# Altium PCB UF_Servo.PcbDoc (part 2 of 12)
Units mm, origin at the board's own origin, x right, y up, seen from the top; angles counter-clockwise.
Board outline 222.63 x 100.1 mm, 6 copper layers (L1, L2, L3, L4, L5, L6), stack 1.609 mm thick; 1138 components, 775 nets, 3720 pads, 1641 vias.
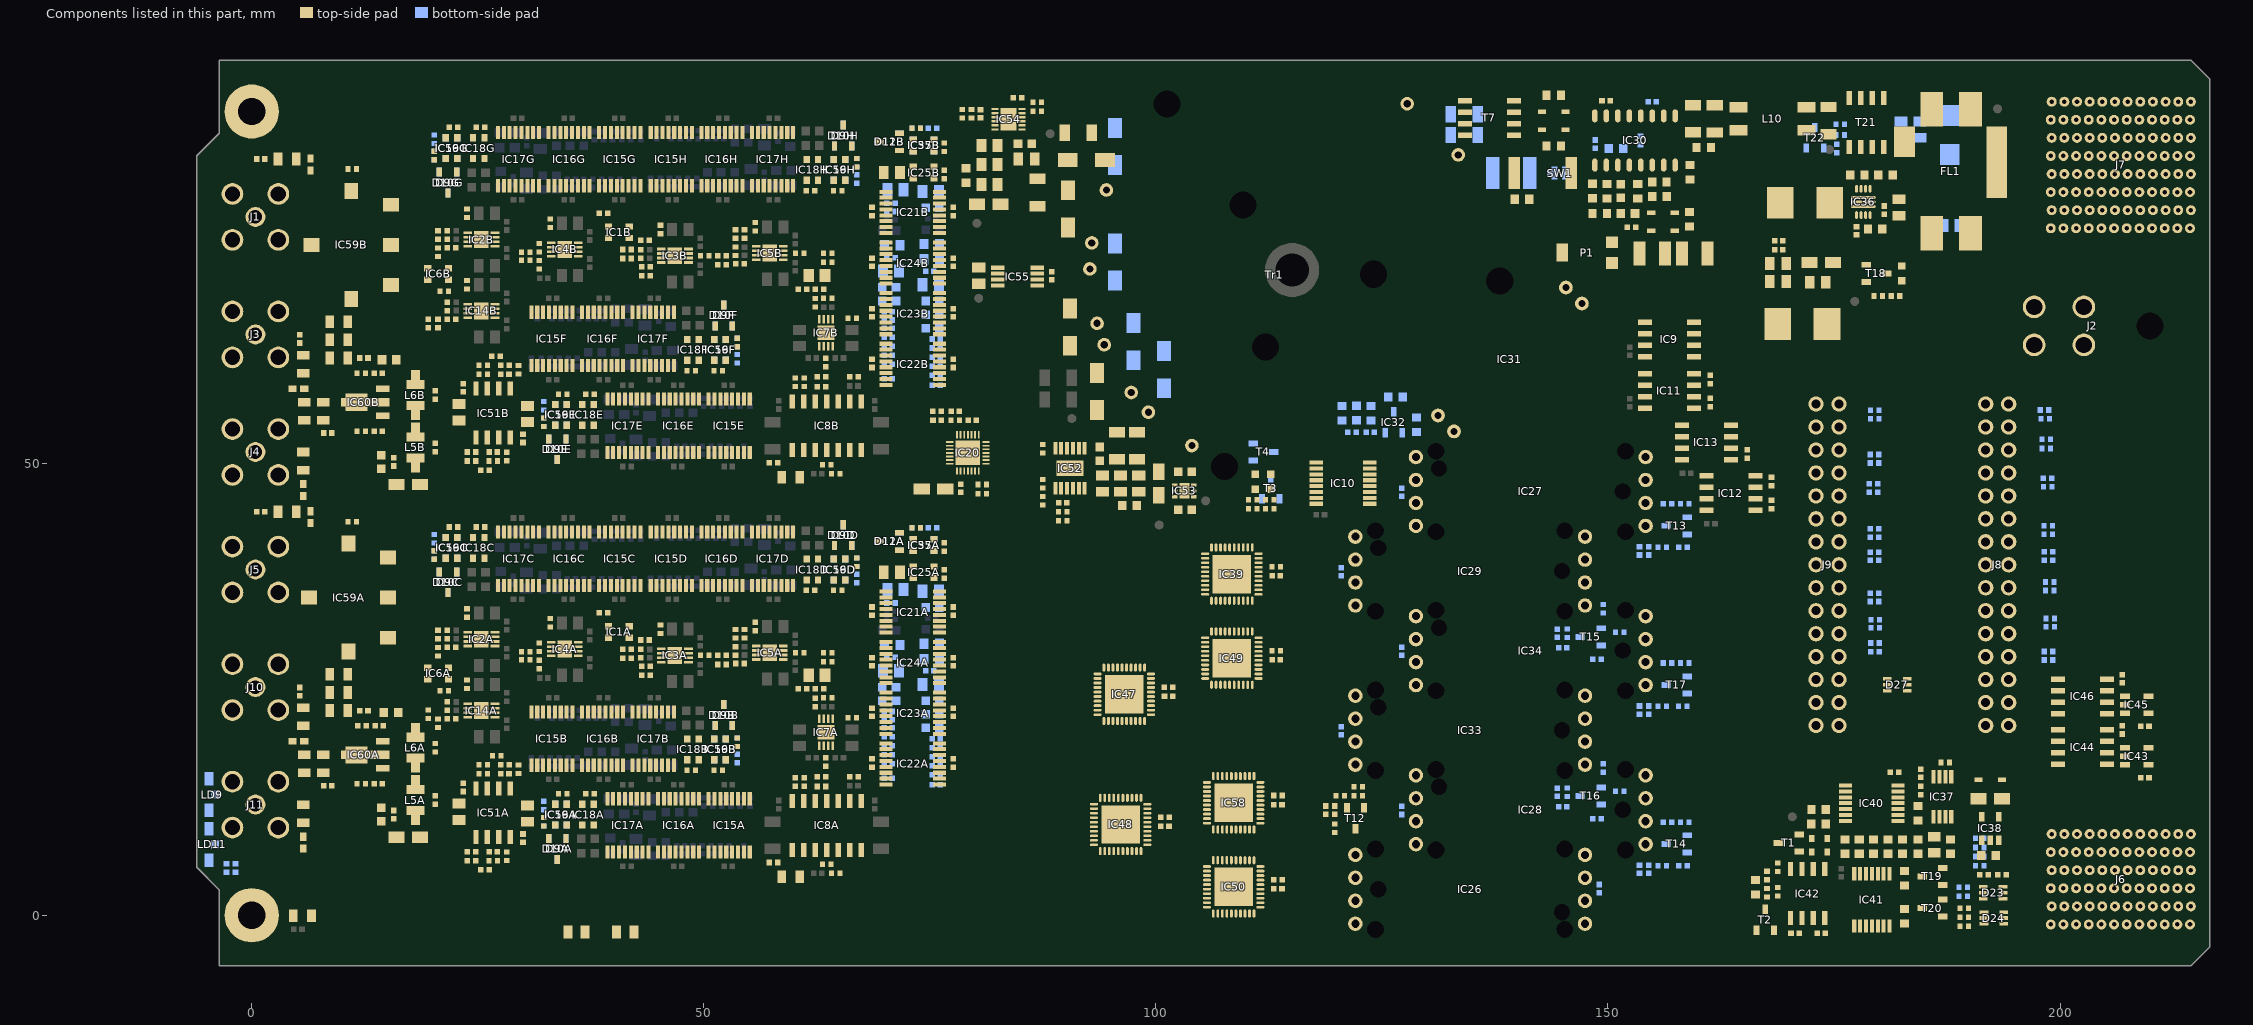
[diagram p6: the components of this part, seen from the top]

## Components (designator, comment, footprint, x,y, rotation, side; value= is the part's Value field where it differs from the comment) (continued)
C84B "22nF" CAPC1005X55N 70.7,77.9 r0 bottom (schematic designator C84)
C85A "1.5uF" CAPC2012X95N 71.2,36.1 r180 bottom (schematic designator C85)
C85B "1.5uF" CAPC2012X95N 71.2,80.3 r180 bottom (schematic designator C85)
C86A "100nF" CAPC1005X55N 70.7,34.6 r180 bottom (schematic designator C86)
C86B "100nF" CAPC1005X55N 70.7,78.8 r180 bottom (schematic designator C86)
C87A "2.2uF" CAPC2012X95N 75.1,35.9 r0 bottom (schematic designator C87)
C87B "2.2uF" CAPC2012X95N 75.1,80.1 r0 bottom (schematic designator C87)
C88A "1uF" CAPC1608X90N 75.3,34.1 r0 bottom (schematic designator C88)
C88B "1uF" CAPC1608X90N 75.3,78.3 r0 bottom (schematic designator C88)
C89A "100nF" CAPC1005X55N 68.6,33.7 r270 top (schematic designator C89)
C89B "100nF" CAPC1005X55N 68.6,77.9 r270 top (schematic designator C89)
C90A "470nF" CAPC1005X55N 26.7,7.1 r0 top (schematic designator C90)
C90B "470nF" CAPC1005X55N 26.7,51.3 r0 top (schematic designator C90)
C91A "470nF" CAPC1005X55N 28,15.7 r0 top (schematic designator C91)
C91B "470nF" CAPC1005X55N 28,59.9 r0 top (schematic designator C91)
C92 "47uF" CAPC3216X180N 86.9,80 r270 top
C93 "47uF" CAPC3216X180N 91.4,86.6 r0 top
C94A "10uF" CAPC2012X95N 22.9,11.5 r90 top (schematic designator C94)
C94B "10uF" CAPC2012X95N 22.9,55.7 r90 top (schematic designator C94)
C95A "100nF" CAPC1005X55N 23.4,14.2 r270 top (schematic designator C95)
C95B "100nF" CAPC1005X55N 23.4,58.4 r270 top (schematic designator C95)
C96A "100nF" CAPC1005X55N 77.6,33.7 r270 top (schematic designator C96)
C96B "100nF" CAPC1005X55N 77.6,77.9 r270 top (schematic designator C96)
C97A "100pF" CAPC1005X55N 75.7,14.5 r180 bottom (schematic designator C97)
C97B "100pF" CAPC1005X55N 75.7,58.7 r180 bottom (schematic designator C97)
C98A "200pF" CAPC1005X55N 70.4,15.2 r180 bottom (schematic designator C98)
C98B "200pF" CAPC1005X55N 70.4,59.4 r180 bottom (schematic designator C98)
C99A "200pF" CAPC1005X55N 70.4,16.8 r180 bottom (schematic designator C99)
C99B "200pF" CAPC1005X55N 70.4,61 r180 bottom (schematic designator C99)
C100A "200pF" CAPC1005X55N 70.4,17.8 r180 bottom (schematic designator C100)
C100B "200pF" CAPC1005X55N 70.4,62 r180 bottom (schematic designator C100)
C101A "750pF" CAPC1005X55N 75.7,15.6 r0 bottom (schematic designator C101)
C101B "750pF" CAPC1005X55N 75.7,59.8 r0 bottom (schematic designator C101)
C102A "47pF" CAPC1005X55N 75.7,16.6 r180 bottom (schematic designator C102)
C102B "47pF" CAPC1005X55N 75.7,60.8 r180 bottom (schematic designator C102)
C103A "100nF" CAPC1005X55N 68.6,16.9 r270 top (schematic designator C103)
C103B "100nF" CAPC1005X55N 68.6,61.1 r270 top (schematic designator C103)
C104A "100nF" CAPC1005X55N 77.6,16.9 r270 top (schematic designator C104)
C104B "100nF" CAPC1005X55N 77.6,61.1 r270 top (schematic designator C104)
C105A "1.5nF" CAPC1005X55N 75.7,17.6 r0 bottom (schematic designator C105)
C105B "1.5nF" CAPC1005X55N 75.7,61.8 r0 bottom (schematic designator C105)
C106A "100pF" CAPC1005X55N 75.7,18.6 r180 bottom (schematic designator C106)
C106B "100pF" CAPC1005X55N 75.7,62.8 r180 bottom (schematic designator C106)
C107A "1.5nF" CAPC1005X55N 70.4,19.8 r180 bottom (schematic designator C107)
C107B "1.5nF" CAPC1005X55N 70.4,64 r180 bottom (schematic designator C107)
C108A "1.5nF" CAPC1005X55N 70.4,20.8 r180 bottom (schematic designator C108)
C108B "1.5nF" CAPC1005X55N 70.4,65 r180 bottom (schematic designator C108)
C109A "200pF" CAPC1005X55N 70.4,18.8 r180 bottom (schematic designator C109)
C109B "200pF" CAPC1005X55N 70.4,63 r180 bottom (schematic designator C109)
C110A "4.7nF" CAPC1608X90N 70.5,23.8 r180 bottom (schematic designator C110)
C110B "4.7nF" CAPC1608X90N 70.5,68 r180 bottom (schematic designator C110)
C111A "1.5nF" CAPC1005X55N 70.4,21.7 r180 bottom (schematic designator C111)
C111B "1.5nF" CAPC1005X55N 70.4,65.9 r180 bottom (schematic designator C111)
C112A "100pF" CAPC1005X55N 70.4,22.6 r0 bottom (schematic designator C112)
C112B "100pF" CAPC1005X55N 70.4,66.8 r0 bottom (schematic designator C112)
C113A "10nF" CAPC1608X90N 75.3,22.3 r0 bottom (schematic designator C113)
C113B "10nF" CAPC1608X90N 75.3,66.5 r0 bottom (schematic designator C113)
C114A "2.7nF" CAPC1608X90N 75.3,20.8 r0 bottom (schematic designator C114)
C114B "2.7nF" CAPC1608X90N 75.3,65 r0 bottom (schematic designator C114)
C115A "100nF" CAPC1005X55N 68.6,22.5 r270 top (schematic designator C115)
C115B "100nF" CAPC1005X55N 68.6,66.7 r270 top (schematic designator C115)
C116A "100nF" CAPC1005X55N 77.6,22.5 r270 top (schematic designator C116)
C116B "100nF" CAPC1005X55N 77.6,66.7 r270 top (schematic designator C116)
C117A "100pF" CAPC1005X55N 75.7,19.6 r180 bottom (schematic designator C117)
C117B "100pF" CAPC1005X55N 75.7,63.8 r180 bottom (schematic designator C117)
C118A "22nF" CAPC2012X95N 75.1,25.6 r0 bottom (schematic designator C118)
C118B "22nF" CAPC2012X95N 75.1,69.8 r0 bottom (schematic designator C118)
C119A "3.3nF" CAPC1608X90N 75.3,23.8 r0 bottom (schematic designator C119)
C119B "3.3nF" CAPC1608X90N 75.3,68 r0 bottom (schematic designator C119)
C120A "100pF" CAPC1005X55N 75,27.1 r180 bottom (schematic designator C120)
C120B "100pF" CAPC1005X55N 75,71.3 r180 bottom (schematic designator C120)
C121 "100nF" CAPC1005X55N 149.03,3.006 r90 bottom
C122 "100nF" CAPC1005X55N 119.776,11.694 r270 top
C123 "1uF" CAPC1005X55N 118.776,11.694 r270 top
C124 "100nF" CAPC1005X55N 127.194,46.856 r270 bottom
C125 "1uF" CAPC1005X55N 153.494,40.356 r90 bottom
C126 "100nF" CAPC1005X55N 154.494,40.356 r90 bottom
C127 "100nF" CAPC1005X55N 127.194,11.656 r270 bottom
C128 "100nF" CAPC1005X55N 120.494,38.056 r270 bottom
C129 "1uF" CAPC1005X55N 153.494,5.156 r90 bottom
C130 "10uF" CAPC3216X180N 134.094,88.656 r0 bottom
C131 "47uF" CAPC3216X180N 134.094,86.356 r0 bottom
C132 "100nF" CAPC1005X55N 149.794,90.156 r180 top
C133 "100nF" CAPC1005X55N 154.494,5.156 r90 bottom
C134 "1uF" CAPC1005X55N 144.994,29.656 r180 bottom
C135 "10uF" CAPC3216X180N 159.394,88.156 r90 top
C136 "100nF" CAPC1005X55N 154.894,90.056 r180 bottom
C137 "100nF" CAPC4532X250N 139.294,82.156 r180 bottom
C138 "270pF" CAPC1608X87N 152.194,77.656 r0 top
C139 "220pF" CAPC3225X200N 159.594,73.256 r180 top
C140 "220pF" CAPC3225X200N 154.894,73.256 r180 top
C141 "100nF" CAPC1005X55N 148.594,85.356 r90 bottom
C142 "1nF" CAPC1608X90N 151.394,80.156 r90 top
C143 "1uF" CAPC1608X87N 148.294,80.156 r90 top
C144 "1uF" CAPC1608X87N 155.694,79.556 r180 top
C145 "100nF" CAPC1005X55N 123.7,53.5 r0 bottom
C146 "270pF" CAPC1608X87N 122.2,55.6 r90 bottom
C147 "100nF" CAPC1005X55N 144.394,31.256 r270 bottom
C148 "100nF" CAPC1005X55N 120.494,20.456 r270 bottom
C149 "100nF" CAPC1005X55N 127.194,29.256 r270 bottom
C150 "1uF" CAPC1005X55N 144.994,12.056 r180 bottom
C151 "100nF" CAPC1005X55N 144.394,13.656 r270 bottom
C152 "1uF" CAPC1005X55N 153.494,22.756 r90 bottom
C153 "100nF" CAPC1005X55N 154.494,22.756 r90 bottom
C154A "39nF" CAPC2012X95N 70.7,27.1 r180 bottom (schematic designator C154)
C154B "39nF" CAPC2012X95N 70.7,71.3 r180 bottom (schematic designator C154)
C155A "12nF" CAPC1608X90N 70.5,25.3 r180 bottom (schematic designator C155)
C155B "12nF" CAPC1608X90N 70.5,69.5 r180 bottom (schematic designator C155)
C156A "200pF" CAPC1005X55N 70.7,28.6 r180 bottom (schematic designator C156)
C156B "200pF" CAPC1005X55N 70.7,72.8 r180 bottom (schematic designator C156)
C157A "100nF" CAPC1810X06N 70.85,29.95 r180 bottom (schematic designator C157)
C157B "100nF" CAPC1810X06N 70.85,74.15 r180 bottom (schematic designator C157)
C158 "100nF" CAPC1005X55N 168.894,74.656 r0 top
C159 "100nF" CAPC1005X55N 168.894,73.656 r0 top
C160 "22uF" CAPC2012X135N 168.794,70.156 r0 top
C161 "22uF" CAPC2012X135N 168.794,72.156 r0 top
C162 "22uF" CAPC2012X135N 173.194,70.056 r0 top
C163 "10uF" CAPMP3216X180N 173.594,72.256 r180 top
C164 "100nF" CAPC1005X55N 180.544,78.056 r90 top
C165 "22uF" CAPC2012X135N 182.194,78.356 r90 top
C166 "100nF" CAPC1005X55N 177.494,75.756 r90 top
C167 "47uF" CAPC3216X180N 174.394,87.956 r270 top
C168 "47uF" CAPC3216X180N 161.802,88.132 r270 top
C169 "100nF" CAPC1005X55N 184.594,15.756 r90 top
C170 "10uF" CAPC2012X95N 184.494,86.956 r90 bottom
C171 "10uF" CAPC2012X95N 182.394,86.956 r90 bottom
C172 "10uF" CAPC2012X95N 187.994,76.356 r180 bottom
C173 "1uF" CAPC1608X87N 192.094,6.656 r180 top
C174 "4.7uF" CAPMP3216X180N 192.294,12.956 r0 top
C175A "100nF" CAPC1810X06N 75.2,28.4 r0 bottom (schematic designator C175)
C175B "100nF" CAPC1810X06N 75.2,72.6 r0 bottom (schematic designator C175)
C176A "100nF" CAPC1810X06N 75.2,30.1 r0 bottom (schematic designator C176)
C176B "100nF" CAPC1810X06N 75.2,74.3 r0 bottom (schematic designator C176)
C177A "100nF" CAPC1005X55N 68.6,28.1 r270 top (schematic designator C177)
C177B "100nF" CAPC1005X55N 68.6,72.3 r270 top (schematic designator C177)
C178A "100nF" CAPC1005X55N 77.6,28.1 r270 top (schematic designator C178)
C178B "100nF" CAPC1005X55N 77.6,72.3 r270 top (schematic designator C178)
C179 "22uF" CAPC2012X135N 186.094,7.856 r270 top
C180 "100nF" CAPC1005X55N 173.594,-1.944 r0 top
C181 "100nF" CAPC1005X55N 170.694,-1.944 r180 top
C182 "1uF" CAPC1608X87N 173.294,10.156 r0 top
C183A "10uF" CAPC2012X95N 70.8,38 r0 top (schematic designator C183)
C183B "10uF" CAPC2012X95N 70.8,82.2 r0 top (schematic designator C183)
C184 "100nF" CAPC1005X55N 113.3,37.6 r180 top
C185 "100nF" CAPC1005X55N 101.4,24.3 r180 top
C186 "100nF" CAPC1005X55N 101,9.9 r180 top
C187 "100nF" CAPC1005X55N 113.3,28.3 r180 top
C188 "100nF" CAPC1005X55N 113.5,3 r180 top
C189A "100nF" CAPC1005X55N 30,8.6 r90 top (schematic designator C189)
C189B "100nF" CAPC1005X55N 30,52.8 r90 top (schematic designator C189)
C190A "10uF" CAPC2012X95N 30.5,11.3 r270 top (schematic designator C190)
C190B "10uF" CAPC2012X95N 30.5,55.5 r270 top (schematic designator C190)
C191 "100nF" CAPC1005X55N 77.8,55.8 r180 top
C192 "1uF" CAPC1005X55N 75.8,54.8 r0 top
C193 "100nF" CAPC1005X55N 78.4,47.3 r90 top
C194 "100nF" CAPC1005X55N 79.7,54.8 r180 top
C195 "10uF" CAPMP3216X180N 75.4,47.2 r180 top
C196 "47uF" CAPC3216X180N 95.7,52 r90 top
C197 "47uF" CAPC3216X180N 97.9,52 r90 top
C198 "4.7uF" CAPC1608X90N 93.8,51.1 r90 top
C199 "10uF" CAPMP3216X180N 100.3,47.8 r90 top
C200 "10uF" CAPC2012X95N 94.075,47.8 r270 top
C201 "10uF" CAPC2012X95N 96.1,47.8 r270 top
C202 "10uF" CAPC2012X95N 98.1,47.8 r270 top
C203 "10nF" CAPC1005X55N 89.7,45.7 r180 top
C204 "4.7uF" CAPC1608X90N 103.2,49.1 r180 top
C205 "4.7uF" CAPC1608X90N 103.2,44.9 r0 top
C206 "10uF" CAPMP3216X180N 81.5,78.7 r0 top
C207 "10uF" CAPC2012X95N 81.6,83.1 r180 top
C208 "10uF" CAPC2012X95N 81.6,85.2 r180 top
C209 "10uF" CAPC2012X95N 81.6,80.9 r180 top
C210 "22uF" CAPC2012X135N 85.7,83.7 r0 top
C211 "4.7uF" CAPC1608X90N 85.5,85.4 r0 top
C212 "10nF" CAPC1005X55N 80.6,88.7 r90 top
C213 "100nF" CAPC1005X55N 88.5,70.8 r270 top
C214 "47uF" CAPC2012X140N 80.4,70.8 r270 top
C215 "100nF" CAPC1005X55N 113.5,12.3 r180 top
C216A "47nF" CAPC1005X55N 1,44.7 r0 top (schematic designator C216)
C216B "47nF" CAPC1005X55N 1,83.7 r0 top (schematic designator C216)
C217A "10uF" CAPMP3216X180N 17.3,8.7 r0 top (schematic designator C217)
C217B "10uF" CAPMP3216X180N 17.3,47.7 r0 top (schematic designator C217)
C218A "4.7uF" CAPC1608X90N 14.3,11.2 r270 top (schematic designator C218)
C218B "4.7uF" CAPC1608X90N 14.3,50.2 r270 top (schematic designator C218)
C219 "100nF" CAPC1005X55N 206.894,20.556 r90 top
C220 "100nF" CAPC1005X55N 206.894,26.206 r90 top
C221A "100nF" CAPC1005X55N 15.7,11.2 r90 top (schematic designator C221)
C221B "100nF" CAPC1005X55N 15.7,50.2 r90 top (schematic designator C221)
C222A "100nF" CAPC1005X55N 5.3,24.8 r90 top (schematic designator C222)
C222B "100nF" CAPC1005X55N 5.3,63.8 r90 top (schematic designator C222)
C223A "100nF" CAPC1005X55N 8.4,14.4 r180 top (schematic designator C223)
C223B "100nF" CAPC1005X55N 8.4,53.4 r180 top (schematic designator C223)
C224A "47nF" CAPC1005X55N 12.4,22.7 r180 top (schematic designator C224)
C224B "47nF" CAPC1005X55N 12.4,61.7 r180 top (schematic designator C224)
C225A "15pF" CAPC1005X55N 14,14.6 r0 top (schematic designator C225)
C225B "15pF" CAPC1005X55N 14,53.6 r0 top (schematic designator C225)
C226A "15pF" CAPC1005X55N 14.1,21 r0 top (schematic designator C226)
C226B "15pF" CAPC1005X55N 14,60 r0 top (schematic designator C226)
C298 "100nF" CAPC1005X55N 181.694,15.856 r0 top
C306 "100nF" CAPC1005X55N 209.394,15.256 r0 top
C307 "100nF" CAPC1005X55N 209.394,20.956 r0 top
D1 "BAT165" SOD2512X110N 143.994,86.956 r180 top
D2 "SS16" DIOM5127X229N 90.5,65.1 r90 top
D3 "SS16" DIOM5127X229N 93.5,58 r90 top
D4 "BAT165" SOD2512X110N 143.994,88.956 r180 top
D5 "SS16" DIOM5127X229N 97.5,63.5 r90 bottom
D6 "SS16" DIOM5127X229N 100.9,60.4 r90 bottom
D7 "BAT165" SOD2512X110N 156.094,77.756 r0 top
D8 "BAT165" SOD2512X110N 156.094,75.756 r180 top
D9A "BB201" SOT95P230X110-3N 33.8,7.4 r270 top (schematic designator D9)
D9B "BB201" SOT95P230X110-3N 52.2,22.2 r90 top (schematic designator D9)
D9C "BB201" SOT95P230X110-3N 21.7,36.9 r270 top (schematic designator D9)
D9D "BB201" SOT95P230X110-3N 65.4,42.1 r90 top (schematic designator D9)
D9E "BB201" SOT95P230X110-3N 33.8,51.6 r270 top (schematic designator D9)
D9F "BB201" SOT95P230X110-3N 52.2,66.4 r90 top (schematic designator D9)
D9G "BB201" SOT95P230X110-3N 21.7,81.1 r270 top (schematic designator D9)
D9H "BB201" SOT95P230X110-3N 65.4,86.3 r90 top (schematic designator D9)
D10A "BB201" SOT95P230X110-3N 33.8,7.4 r270 bottom (schematic designator D10)
D10B "BB201" SOT95P230X110-3N 52.2,22.2 r90 bottom (schematic designator D10)
D10C "BB201" SOT95P230X110-3N 21.7,36.9 r270 bottom (schematic designator D10)
D10D "BB201" SOT95P230X110-3N 65.4,42.1 r90 bottom (schematic designator D10)
D10E "BB201" SOT95P230X110-3N 33.8,51.6 r270 bottom (schematic designator D10)
D10F "BB201" SOT95P230X110-3N 52.2,66.4 r90 bottom (schematic designator D10)
D10G "BB201" SOT95P230X110-3N 21.7,81.1 r270 bottom (schematic designator D10)
D10H "BB201" SOT95P230X110-3N 65.4,86.3 r90 bottom (schematic designator D10)
D11A "BB201" SOT95P230X110-3N 70.5,41.4 r180 top (schematic designator D11)
D11B "BB201" SOT95P230X110-3N 70.5,85.6 r180 top (schematic designator D11)
D12A "BB201" SOT95P230X110-3N 70.5,41.4 r180 bottom (schematic designator D12)
D12B "BB201" SOT95P230X110-3N 70.5,85.6 r180 bottom (schematic designator D12)
D13 "SS16" DIOM5127X229N 90.3,78.2 r90 top
D14 "SS16" DIOM5127X229N 92.3,83.6 r180 top
D15 "SS16" DIOM5127X229N 95.5,85.1 r270 bottom
D16 "SS16" DIOM5127X229N 95.5,72.3 r90 bottom
D17A "0402ESDA-MLP" EATON_0402ESDA-MLP 5.7,8.1 r90 top (schematic designator D17)
D17B "0402ESDA-MLP" EATON_0402ESDA-MLP 5.7,47.1 r90 top (schematic designator D17)
D18A "0402ESDA-MLP" EATON_0402ESDA-MLP 6.5,44.1 r90 top (schematic designator D18)
D18B "0402ESDA-MLP" EATON_0402ESDA-MLP 6.5,83.1 r90 top (schematic designator D18)
D19A "0402ESDA-MLP" EATON_0402ESDA-MLP 5.15,19.3 r0 top (schematic designator D19)
D19B "0402ESDA-MLP" EATON_0402ESDA-MLP 5.15,58.3 r0 top (schematic designator D19)
D21 "SMBJ12A" DIOM5336X265N 187.794,86.356 r270 bottom
D22 "BAT165" SOD2512X110N 192.294,15.056 r180 top
D23 "PESD3V3L5UY" SOT65P210X110-6N 192.594,2.556 r0 top
D24 "PESD3V3L5UY" SOT65P210X110-6N 192.694,-0.244 r0 top
D25 "CDBU0520-HF" SOD-523F 173.394,7.056 r180 top
D26 "CDBU0520-HF" SOD-523F 173.394,8.556 r180 top
D27 "PESD3V3L5UY" SOT65P210X110-6N 181.994,25.556 r180 top
FL1 "10A/50VDC" FIL_MURATA_BNX02 187.894,82.356 r90 top locked
IC1A "AQY221N3M" PANASONIC_AQY22(SON) 40.6,31.4 r0 top (schematic designator IC1)
IC1B "AQY221N3M" PANASONIC_AQY22(SON) 40.6,75.6 r0 top (schematic designator IC1)
IC2A "ADA4899-1YCPZ" SON50P300X300X90-9N-R160X189 25.4,30.6 r0 top (schematic designator IC2)
IC2B "ADA4899-1YCPZ" SON50P300X300X90-9N-R160X189 25.4,74.8 r0 top (schematic designator IC2)
IC3A "ADA4899-1YCPZ" SON50P300X300X90-9N-R160X189 46.8,28.8 r0 top (schematic designator IC3)
IC3B "ADA4899-1YCPZ" SON50P300X300X90-9N-R160X189 46.8,73 r0 top (schematic designator IC3)
IC4A "ADA4899-1YCPZ" SON50P300X300X90-9N-R160X189 34.6,29.5 r0 top (schematic designator IC4)
IC4B "ADA4899-1YCPZ" SON50P300X300X90-9N-R160X189 34.6,73.7 r0 top (schematic designator IC4)
IC5A "ADA4899-1YCPZ" SON50P300X300X90-9N-R160X189 57.3,29.1 r0 top (schematic designator IC5)
IC5B "ADA4899-1YCPZ" SON50P300X300X90-9N-R160X189 57.3,73.3 r0 top (schematic designator IC5)
IC6A "AQY221N3M" PANASONIC_AQY22(SON) 20.6,26.8 r180 top (schematic designator IC6)
IC6B "AQY221N3M" PANASONIC_AQY22(SON) 20.6,71 r180 top (schematic designator IC6)
IC7A "ADA4899-1YCPZ" SON50P300X300X90-9N-R160X189 63.5,20.3 r270 top (schematic designator IC7)
IC7B "ADA4899-1YCPZ" SON50P300X300X90-9N-R160X189 63.5,64.5 r270 top (schematic designator IC7)
IC8A "VCA824ID" SOIC127P600X175-14N 63.6,10 r270 top (schematic designator IC8)
IC8B "VCA824ID" SOIC127P600X175-14N 63.6,54.2 r270 top (schematic designator IC8)
IC9 "FIN1027AMX" SOIC127P600X175-8N 156.794,63.756 r0 top
IC10 "74HC138PW" SOP65P640X110-16N 120.7,47.85 r180 top
IC11 "FIN1028MX" SOIC127P600X175-8N 156.794,58.056 r180 top
IC12 "FIN1028MX" SOIC127P600X175-8N 163.594,46.756 r180 top
IC13 "FIN1028MX" SOIC127P600X175-8N 160.894,52.356 r180 top
IC14A "ADA4899-1YCPZ" SON50P300X300X90-9N-R160X189 25.4,22.7 r0 top (schematic designator IC14)
IC14B "ADA4899-1YCPZ" SON50P300X300X90-9N-R160X189 25.4,66.9 r0 top (schematic designator IC14)
IC15A "DG211BDQ-T1-E3" SOP65P640X120-16N 52.8,10 r270 top (schematic designator IC15)
IC15B "DG211BDQ-T1-E3" SOP65P640X120-16N 33.2,19.6 r90 top (schematic designator IC15)
IC15C "DG211BDQ-T1-E3" SOP65P640X120-16N 40.7,39.5 r270 top (schematic designator IC15)
IC15D "DG211BDQ-T1-E3" SOP65P640X120-16N 46.4,39.5 r90 top (schematic designator IC15)
IC15E "DG211BDQ-T1-E3" SOP65P640X120-16N 52.8,54.2 r270 top (schematic designator IC15)
IC15F "DG211BDQ-T1-E3" SOP65P640X120-16N 33.2,63.8 r90 top (schematic designator IC15)
IC15G "DG211BDQ-T1-E3" SOP65P640X120-16N 40.7,83.7 r270 top (schematic designator IC15)
IC15H "DG211BDQ-T1-E3" SOP65P640X120-16N 46.4,83.7 r90 top (schematic designator IC15)
IC16A "DG211BDQ-T1-E3" SOP65P640X120-16N 47.2,10 r270 top (schematic designator IC16)
IC16B "DG211BDQ-T1-E3" SOP65P640X120-16N 38.8,19.6 r90 top (schematic designator IC16)
IC16C "DG211BDQ-T1-E3" SOP65P640X120-16N 35.1,39.5 r270 top (schematic designator IC16)
IC16D "DG211BDQ-T1-E3" SOP65P640X120-16N 52,39.5 r90 top (schematic designator IC16)
IC16E "DG211BDQ-T1-E3" SOP65P640X120-16N 47.2,54.2 r270 top (schematic designator IC16)
IC16F "DG211BDQ-T1-E3" SOP65P640X120-16N 38.8,63.8 r90 top (schematic designator IC16)
IC16G "DG211BDQ-T1-E3" SOP65P640X120-16N 35.1,83.7 r270 top (schematic designator IC16)
IC16H "DG211BDQ-T1-E3" SOP65P640X120-16N 52,83.7 r90 top (schematic designator IC16)
IC17A "DG211BDQ-T1-E3" SOP65P640X120-16N 41.6,10 r270 top (schematic designator IC17)
IC17B "DG211BDQ-T1-E3" SOP65P640X120-16N 44.4,19.6 r90 top (schematic designator IC17)
IC17C "DG211BDQ-T1-E3" SOP65P640X120-16N 29.5,39.5 r270 top (schematic designator IC17)
IC17D "DG211BDQ-T1-E3" SOP65P640X120-16N 57.6,39.5 r90 top (schematic designator IC17)
IC17E "DG211BDQ-T1-E3" SOP65P640X120-16N 41.6,54.2 r270 top (schematic designator IC17)
IC17F "DG211BDQ-T1-E3" SOP65P640X120-16N 44.4,63.8 r90 top (schematic designator IC17)
IC17G "DG211BDQ-T1-E3" SOP65P640X120-16N 29.5,83.7 r270 top (schematic designator IC17)
IC17H "DG211BDQ-T1-E3" SOP65P640X120-16N 57.6,83.7 r90 top (schematic designator IC17)
IC18A "AQY221N3M" PANASONIC_AQY22(SON) 37.2,11.2 r270 top (schematic designator IC18)
IC18B "AQY221N3M" PANASONIC_AQY22(SON) 48.8,18.4 r90 top (schematic designator IC18)
IC18C "AQY221N3M" PANASONIC_AQY22(SON) 25.1,40.7 r270 top (schematic designator IC18)
IC18D "AQY221N3M" PANASONIC_AQY22(SON) 62,38.3 r90 top (schematic designator IC18)
IC18E "AQY221N3M" PANASONIC_AQY22(SON) 37.2,55.4 r270 top (schematic designator IC18)
IC18F "AQY221N3M" PANASONIC_AQY22(SON) 48.8,62.6 r90 top (schematic designator IC18)
IC18G "AQY221N3M" PANASONIC_AQY22(SON) 25.1,84.9 r270 top (schematic designator IC18)
IC18H "AQY221N3M" PANASONIC_AQY22(SON) 62,82.5 r90 top (schematic designator IC18)
IC19A "AQY221N3M" PANASONIC_AQY22(SON) 34.2,11.2 r270 top (schematic designator IC19)
IC19B "AQY221N3M" PANASONIC_AQY22(SON) 51.8,18.4 r90 top (schematic designator IC19)
IC19C "AQY221N3M" PANASONIC_AQY22(SON) 22.1,40.7 r270 top (schematic designator IC19)
IC19D "AQY221N3M" PANASONIC_AQY22(SON) 65,38.3 r90 top (schematic designator IC19)
IC19E "AQY221N3M" PANASONIC_AQY22(SON) 34.2,55.4 r270 top (schematic designator IC19)
IC19F "AQY221N3M" PANASONIC_AQY22(SON) 51.8,62.6 r90 top (schematic designator IC19)
IC19G "AQY221N3M" PANASONIC_AQY22(SON) 22.1,84.9 r270 top (schematic designator IC19)
IC19H "AQY221N3M" PANASONIC_AQY22(SON) 65,82.5 r90 top (schematic designator IC19)
IC20 "AD5674RBCPZ-1" QFN40P400X400X100-29N-S270 79.2,51.2 r90 top
IC21A "DG211BDQ-T1-E3" SOP65P640X120-16N 73.1,33.6 r180 top (schematic designator IC21)
IC21B "DG211BDQ-T1-E3" SOP65P640X120-16N 73.1,77.8 r180 top (schematic designator IC21)
IC22A "DG211BDQ-T1-E3" SOP65P640X120-16N 73.1,16.8 r180 top (schematic designator IC22)
IC22B "DG211BDQ-T1-E3" SOP65P640X120-16N 73.1,61 r180 top (schematic designator IC22)
IC23A "DG211BDQ-T1-E3" SOP65P640X120-16N 73.1,22.4 r180 top (schematic designator IC23)
IC23B "DG211BDQ-T1-E3" SOP65P640X120-16N 73.1,66.6 r180 top (schematic designator IC23)
IC24A "DG211BDQ-T1-E3" SOP65P640X120-16N 73.1,28 r180 top (schematic designator IC24)
IC24B "DG211BDQ-T1-E3" SOP65P640X120-16N 73.1,72.2 r180 top (schematic designator IC24)
IC25A "AQY221N3M" PANASONIC_AQY22(SON) 74.3,38 r180 top (schematic designator IC25)
IC25B "AQY221N3M" PANASONIC_AQY22(SON) 74.3,82.2 r180 top (schematic designator IC25)
IC26 "AFBR-390525RZ" BROADCOM_AFBR-390525RZ 134.762,2.931 r0 top locked
IC27 "AFBR-390525RZ" BROADCOM_AFBR-390525RZ 141.462,46.931 r180 top locked
IC28 "AFBR-390525RZ" BROADCOM_AFBR-390525RZ 141.462,11.731 r180 top locked
IC29 "AFBR-390525RZ" BROADCOM_AFBR-390525RZ 134.762,38.131 r180 top locked
IC30 "L6599AD" SOP127P600X175-16N 152.994,85.756 r90 top locked
IC31 "OPI1264C" OPI1264C 139.162,61.531 r225 top
IC32 "TL431AIDBZ" SOT95P237X112-3N 126.3,54.6 r90 bottom
IC33 "AFBR-390525RZ" BROADCOM_AFBR-390525RZ 134.762,20.531 r180 top locked
IC34 "AFBR-390525RZ" BROADCOM_AFBR-390525RZ 141.462,29.331 r180 top locked
IC35A "AQY221N3M" PANASONIC_AQY22(SON) 74.3,41 r180 top (schematic designator IC35)
IC35B "AQY221N3M" PANASONIC_AQY22(SON) 74.3,85.2 r180 top (schematic designator IC35)
IC36 "TPS62148RGX" TEXAS_RGX0011A 178.244,78.956 r180 top
IC37 "LM75AIMM/NOPB" SOP65P490X109-8N 186.994,13.156 r90 top
IC38 "MIC5219-3.3YM5" SOT95P280X145-5N 192.294,9.656 r90 top
IC39 "MAX7301ATL+" QFN50P600X600X80-41N-S425 108.4,37.8 r270 top
IC40 "74HC4066PW" SOP65P640X110-14N 179.194,12.456 r0 top
IC41 "74HC4066PW" SOP65P640X110-14N 179.194,1.756 r90 top
IC42 "TLC555ID" SOIC127P600X175-8N 172.094,2.456 r270 top
IC43 "24AA02E48T-I/OT" SOT95P280X145-5N 208.494,17.656 r0 top
IC44 "24AA025E48-I/SN" SOIC127P600X175-8N 202.494,18.656 r0 top
IC45 "24AA02E48T-I/OT" SOT95P280X145-5N 208.494,23.356 r0 top
IC46 "24AA025E48-I/SN" SOIC127P600X175-8N 202.494,24.256 r0 top
IC47 "MAX7301ATL+" QFN50P600X600X80-41N-S425 96.5,24.5 r270 top
IC48 "MAX7301ATL+" QFN50P600X600X80-41N-S425 96.1,10.1 r270 top
IC49 "MAX7301ATL+" QFN50P600X600X80-41N-S425 108.4,28.5 r270 top
IC50 "MAX7301ATL+" QFN50P600X600X80-41N-S425 108.6,3.2 r270 top
IC51A "ADA4841-2YRZ" SOIC127P600X175-8N 26.7,11.4 r270 top (schematic designator IC51)
IC51B "ADA4841-2YRZ" SOIC127P600X175-8N 26.7,55.6 r270 top (schematic designator IC51)
IC52 "LT3045EMSE" SOP65P490X110-13N-R175X294 90.5,49.5 r270 top
IC53 "LP5912-3.3DRVT" SON65P200X200X80-7N-R110X170 103.15,47 r180 top
IC54 "LT3094EDD" SON45P300X300X80-13N-R175X248 83.7,88.1 r180 top
IC55 "LTC6655BHMS8-2.5#TRPBF" SOP65P490X110-8N 84.7,70.7 r180 top
IC56A "AQY221N3M" PANASONIC_AQY22(SON) 34.2,11.2 r270 bottom (schematic designator IC56)
IC56B "AQY221N3M" PANASONIC_AQY22(SON) 51.8,18.4 r90 bottom (schematic designator IC56)
IC56C "AQY221N3M" PANASONIC_AQY22(SON) 22.1,40.7 r270 bottom (schematic designator IC56)
IC56D "AQY221N3M" PANASONIC_AQY22(SON) 65,38.3 r90 bottom (schematic designator IC56)
IC56E "AQY221N3M" PANASONIC_AQY22(SON) 34.2,55.4 r270 bottom (schematic designator IC56)
IC56F "AQY221N3M" PANASONIC_AQY22(SON) 51.8,62.6 r90 bottom (schematic designator IC56)
IC56G "AQY221N3M" PANASONIC_AQY22(SON) 22.1,84.9 r270 bottom (schematic designator IC56)
IC56H "AQY221N3M" PANASONIC_AQY22(SON) 65,82.5 r90 bottom (schematic designator IC56)
IC57A "AQY221N3M" PANASONIC_AQY22(SON) 74.3,41 r180 bottom (schematic designator IC57)
IC57B "AQY221N3M" PANASONIC_AQY22(SON) 74.3,85.2 r180 bottom (schematic designator IC57)
IC58 "MAX7301ATL+" QFN50P600X600X80-41N-S425 108.6,12.5 r270 top
IC59A "SYPD-1+" MINI-CIRCUITS_TTT167 10.7,35.2 r90 top (schematic designator IC59)
IC59B "SYPD-1+" MINI-CIRCUITS_TTT167 11,74.2 r90 top (schematic designator IC59)
IC60A "GVA-81+" MINI-CIRCUITS_DF782 12.558,17.8 r90 top (schematic designator IC60)
IC60B "GVA-81+" MINI-CIRCUITS_DF782 12.558,56.8 r90 top (schematic designator IC60)
J1 "SMA" AMPHENOL_132203-12 0.4,77.3 r180 top
J2 "Mini-Fit Jr.™" MOLEX_39-30-0040 199.889,65.245 r270 top locked
J3 "SMA" AMPHENOL_132203-12 0.4,64.3 r180 top
J4 "SMA" AMPHENOL_132203-12 0.4,51.3 r180 top
J5 "SMA" AMPHENOL_132203-12 0.4,38.3 r180 top
J6 "P1" AMPHENOL_10052825-101LF 206.727,4.044 r90 top locked
J7 "P6" AMPHENOL_10052838-101LF 206.727,83.044 r90 top locked
J8 "" 3M_N2530-6002RB 193.05,38.824 r270 top locked
J9 "" 3M_N2530-6002RB 174.28,38.823 r270 top locked
J10 "SMA" AMPHENOL_132203-12 0.4,25.3 r180 top
J11 "SMA" AMPHENOL_132203-12 0.4,12.3 r180 top
L1 "1.5uH" IND_WURTH_WE-LHMI_7050 171.794,78.856 r180 top
L2A "1uH" INDC2113X60N 62.5,26.6 r0 top (schematic designator L2)
L2B "1uH" INDC2113X60N 62.5,70.8 r0 top (schematic designator L2)
L3 "600R@100MHz" INDC1608X95N 97.1,45.4 r0 top
L4 "600R@100MHz" INDC1608X95N 79,81.9 r270 top
L5A "47uH" IND_MURATA_LQH32C 18.1,12.8 r270 top (schematic designator L5)
L5B "47uH" IND_MURATA_LQH32C 18.1,51.8 r270 top (schematic designator L5)
L6A "10uH" IND_MURATA_LQH32C 18.1,18.6 r270 top (schematic designator L6)
L6B "10uH" IND_MURATA_LQH32C 18.1,57.6 r270 top (schematic designator L6)
L7A "600R@100MHz" INDC1608X95N 15.4,22.5 r0 top (schematic designator L7)
L7B "600R@100MHz" INDC1608X95N 15.2,61.5 r0 top (schematic designator L7)
L9 "1.5uH" IND_WURTH_WE-LHMI_7050 171.494,65.456 r0 top
L10 "2x250uH" IND_WURTH_WE-SL2 168.194,88.156 r180 top
LD1 "Green" LED_KINGBRIGHT_KP-1608CGCK 112.7,48 r270 top
LD2 "Green" LED_KINGBRIGHT_KP-1608CGCK 111,48 r270 top
LD9 "Red" LED_AVAGO_HSMC-C110 -4.721,13.411 r270 bottom
LD10 "Green" LED_KINGBRIGHT_KP-1608CGCK 182.494,71.056 r270 top
LD11 "Green" LED_AVAGO_HSME-C110 -4.721,7.899 r270 bottom
M1 "Plated Hole" MTG300_600 0,0.062 r0 top
M2 "Plated Hole" MTG300_600 -0.006,88.956 r0 top
P1 "10k" TRIM_BOURNS_3314G-1 147.694,73.356 r90 top
R1 "1M1" RESC2012X60N 5.6,0 r0 top
R2 "10M" RESC2113X55N 41.3,-1.8 r180 top
R3 "10M" RESC2113X55N 35.9,-1.8 r180 top
R4A "10" RESC1005X40N 43.5,30.5 r0 top (schematic designator R4)
R4B "10" RESC1005X40N 43.5,74.7 r0 top (schematic designator R4)
R5A "330" RESC1005X40N 21.6,31.1 r90 top (schematic designator R5)
R5B "330" RESC1005X40N 21.6,75.3 r90 top (schematic designator R5)
R6A "220" RESC1005X40N 38.9,33.5 r0 top (schematic designator R6)
R6B "220" RESC1005X40N 38.9,77.7 r0 top (schematic designator R6)
R7A "10" RESC1005X40N 41.5,29.5 r180 top (schematic designator R7)
R7B "10" RESC1005X40N 41.5,73.7 r180 top (schematic designator R7)
R8A "180" RESC1005X40N 53.5,31.2 r90 top (schematic designator R8)
R8B "180" RESC1005X40N 53.5,75.4 r90 top (schematic designator R8)
R9A "10" RESC1005X40N 54.5,31.2 r90 top (schematic designator R9)
R9B "10" RESC1005X40N 54.5,75.4 r90 top (schematic designator R9)
R10A "560" RESC1005X40N 63.7,28.1 r180 top (schematic designator R10)
R10B "560" RESC1005X40N 63.7,72.3 r180 top (schematic designator R10)
R11A "27" RESC1005X40N 22.1,29.7 r0 top (schematic designator R11)
R11B "27" RESC1005X40N 22.1,73.9 r0 top (schematic designator R11)
R12A "33" RESC1005X40N 20.6,29.2 r90 top (schematic designator R12)
R12B "33" RESC1005X40N 20.6,73.4 r90 top (schematic designator R12)
R13A "15k" RESC1005X40N 43,29 r90 top (schematic designator R13)
R13B "15k" RESC1005X40N 43,73.2 r90 top (schematic designator R13)
R14A "100" RESC1005X40N 23.8,33.5 r90 top (schematic designator R14)
R14B "100" RESC1005X40N 23.8,77.7 r90 top (schematic designator R14)
R15A "330" RESC1005X40N 31.8,29.7 r90 top (schematic designator R15)
R15B "330" RESC1005X40N 31.8,73.9 r90 top (schematic designator R15)
R16A "2k2" RESC1005X40N 53.5,29.3 r90 top (schematic designator R16)
R16B "2k2" RESC1005X40N 53.5,73.5 r90 top (schematic designator R16)
R17A "330" RESC1005X40N 66.6,15.4 r180 top (schematic designator R17)
R17B "330" RESC1005X40N 66.6,59.6 r180 top (schematic designator R17)
R18A "10" RESC1005X40N 62.8,25.1 r0 top (schematic designator R18)
R18B "10" RESC1005X40N 62.8,69.3 r0 top (schematic designator R18)
R19A "560" RESC1005X40N 63.7,29.1 r180 top (schematic designator R19)
R19B "560" RESC1005X40N 63.7,73.3 r180 top (schematic designator R19)
R20A "27k" RESC1005X40N 63.7,24.1 r0 top (schematic designator R20)
R20B "27k" RESC1005X40N 63.7,68.3 r0 top (schematic designator R20)
R21A "680" RESC1005X40N 64.6,4.7 r180 top (schematic designator R21)
R21B "680" RESC1005X40N 64.6,48.9 r180 top (schematic designator R21)
R22A "200" RESC1005X40N 41.5,28.5 r0 top (schematic designator R22)
R22B "200" RESC1005X40N 41.5,72.7 r0 top (schematic designator R22)
R23A "680" RESC1005X40N 63.6,5.7 r180 top (schematic designator R23)
R23B "680" RESC1005X40N 63.6,49.9 r180 top (schematic designator R23)
R24A "160" RESC1005X40N 20.6,31.1 r270 top (schematic designator R24)
R24B "160" RESC1005X40N 20.6,75.3 r270 top (schematic designator R24)
R25 "100" RESC1005X40N 161.294,56.786 r270 top
R26 "100" RESC1005X40N 161.294,59.326 r270 top
R27 "100" RESC1005X40N 168.094,45.486 r270 top
R28 "100" RESC1005X40N 168.094,48.026 r270 top
R29 "100" RESC1005X40N 165.394,51.086 r270 top
R30A "330" RESC1005X40N 30.3,29.2 r0 top (schematic designator R30)
R30B "330" RESC1005X40N 30.3,73.4 r0 top (schematic designator R30)
R31A "100" RESC1005X40N 60.9,25.1 r0 top (schematic designator R31)
R31B "100" RESC1005X40N 60.9,69.3 r0 top (schematic designator R31)
R32A "220" RESC1005X40N 21.3,24.9 r0 top (schematic designator R32)
R32B "220" RESC1005X40N 21.3,69.1 r0 top (schematic designator R32)
R33A "68" RESC1005X40N 50.1,28.8 r0 top (schematic designator R33)
R33B "68" RESC1005X40N 50.1,73 r0 top (schematic designator R33)
R34A "330" RESC1005X40N 52,28.8 r0 top (schematic designator R34)
R34B "330" RESC1005X40N 52,73 r0 top (schematic designator R34)
R35A "22" RESC2012X60N 59.6,4.3 r180 top (schematic designator R35)
R35B "22" RESC2012X60N 59.6,48.5 r180 top (schematic designator R35)
R36A "820" RESC1005X40N 25.8,5.1 r0 top (schematic designator R36)
R36B "820" RESC1005X40N 25.8,49.3 r0 top (schematic designator R36)
R37 "10k" RESC1608X55N 182.594,7.656 r270 top
R38A "680" RESC1005X40N 63,14.3 r0 top (schematic designator R38)
R38B "680" RESC1005X40N 63,58.5 r0 top (schematic designator R38)
R39A "27" RESC1005X40N 43.6,27.6 r0 top (schematic designator R39)
R39B "27" RESC1005X40N 43.6,71.8 r0 top (schematic designator R39)
R40A "68" RESC1005X40N 60.6,29.1 r0 top (schematic designator R40)
R40B "68" RESC1005X40N 60.6,73.3 r0 top (schematic designator R40)
R41A "27" RESC1005X40N 54,27.9 r0 top (schematic designator R41)
R41B "27" RESC1005X40N 54,72.1 r0 top (schematic designator R41)
R42A "33" RESC1005X40N 63.5,17 r90 top (schematic designator R42)
R42B "33" RESC1005X40N 63.5,61.2 r90 top (schematic designator R42)
R43A "330" RESC1005X40N 30.3,28.3 r0 top (schematic designator R43)
R43B "330" RESC1005X40N 30.3,72.5 r0 top (schematic designator R43)
R44A "27" RESC1005X40N 62.3,23.6 r270 top (schematic designator R44)
R44B "27" RESC1005X40N 62.3,67.8 r270 top (schematic designator R44)
R45A "33" RESC1005X40N 52,27.8 r0 top (schematic designator R45)
R45B "33" RESC1005X40N 52,72 r0 top (schematic designator R45)
R46A "100" RESC1005X40N 45.2,31.7 r90 top (schematic designator R46)
R46B "100" RESC1005X40N 45.2,75.9 r90 top (schematic designator R46)
R47A "130" RESC1005X40N 63,15.4 r0 top (schematic designator R47)
R47B "130" RESC1005X40N 63,59.6 r0 top (schematic designator R47)
R48A "330" RESC1005X40N 31.8,27.8 r90 top (schematic designator R48)
R48B "330" RESC1005X40N 31.8,72 r90 top (schematic designator R48)
R49A "100" RESC1005X40N 33,32.4 r90 top (schematic designator R49)
R49B "100" RESC1005X40N 33,76.6 r90 top (schematic designator R49)
R50A "100" RESC1005X40N 55.7,32 r90 top (schematic designator R50)
R50B "100" RESC1005X40N 55.7,76.2 r90 top (schematic designator R50)
R51A "33" RESC1005X40N 60.1,14.8 r270 top (schematic designator R51)
R51B "33" RESC1005X40N 60.1,59 r270 top (schematic designator R51)
R52A "100" RESC1005X40N 61.1,14.8 r270 top (schematic designator R52)
R52B "100" RESC1005X40N 61.1,59 r270 top (schematic designator R52)
R53A "330" RESC1005X40N 21.6,23.2 r90 top (schematic designator R53)
R53B "330" RESC1005X40N 21.6,67.4 r90 top (schematic designator R53)
R54A "100" RESC1005X40N 66.4,21.9 r0 top (schematic designator R54)
R54B "100" RESC1005X40N 66.4,66.1 r0 top (schematic designator R54)
R55A "20" RESC1005X40N 57.7,5.9 r180 top (schematic designator R55)
R55B "20" RESC1005X40N 57.7,50.1 r180 top (schematic designator R55)
R56A "10" RESC1005X40N 43.6,26.6 r180 top (schematic designator R56)
R56B "10" RESC1005X40N 43.6,70.8 r180 top (schematic designator R56)
R57A "27" RESC1005X40N 22.1,21.8 r0 top (schematic designator R57)
R57B "27" RESC1005X40N 22.1,66 r0 top (schematic designator R57)
R58A "10k" RESC1005X40N 20.6,21.3 r90 top (schematic designator R58)
R58B "10k" RESC1005X40N 20.6,65.5 r90 top (schematic designator R58)
R59A "100" RESC1005X40N 23.8,25.6 r90 top (schematic designator R59)
R59B "100" RESC1005X40N 23.8,69.8 r90 top (schematic designator R59)
R60A "220" RESC1005X40N 37.4,13.5 r0 top (schematic designator R60)
R60B "220" RESC1005X40N 48.6,16.1 r180 top (schematic designator R60)
R60C "220" RESC1005X40N 25.3,43 r0 top (schematic designator R60)
R60D "220" RESC1005X40N 61.8,36 r180 top (schematic designator R60)
R60E "220" RESC1005X40N 37.4,57.7 r0 top (schematic designator R60)
R60F "220" RESC1005X40N 48.6,60.3 r180 top (schematic designator R60)
R60G "220" RESC1005X40N 25.3,87.2 r0 top (schematic designator R60)
R60H "220" RESC1005X40N 61.8,80.2 r180 top (schematic designator R60)
R61A "220" RESC1005X40N 34.4,13.5 r0 top (schematic designator R61)
R61B "220" RESC1005X40N 51.6,16.1 r180 top (schematic designator R61)
R61C "220" RESC1005X40N 22.3,43 r0 top (schematic designator R61)
R61D "220" RESC1005X40N 64.8,36 r180 top (schematic designator R61)
R61E "220" RESC1005X40N 34.4,57.7 r0 top (schematic designator R61)
R61F "220" RESC1005X40N 51.6,60.3 r180 top (schematic designator R61)
R61G "220" RESC1005X40N 22.3,87.2 r0 top (schematic designator R61)
R61H "220" RESC1005X40N 64.8,80.2 r180 top (schematic designator R61)
R62A "100k" RESC1005X40N 32.3,10.4 r90 bottom (schematic designator R62)
R62B "100k" RESC1005X40N 53.7,19.2 r270 bottom (schematic designator R62)
R62C "100k" RESC1005X40N 20.2,39.9 r90 bottom (schematic designator R62)
R62D "100k" RESC1005X40N 66.9,39.1 r270 bottom (schematic designator R62)
R62E "100k" RESC1005X40N 32.3,54.6 r90 bottom (schematic designator R62)
R62F "100k" RESC1005X40N 53.7,63.4 r270 bottom (schematic designator R62)
R62G "100k" RESC1005X40N 20.2,84.1 r90 bottom (schematic designator R62)
R62H "100k" RESC1005X40N 66.9,83.3 r270 bottom (schematic designator R62)
R63A "220" RESC1005X40N 76.6,37.8 r270 top (schematic designator R63)
R63B "220" RESC1005X40N 76.6,82 r270 top (schematic designator R63)
R64A "220" RESC1005X40N 76.6,40.8 r270 top (schematic designator R64)
R64B "220" RESC1005X40N 76.6,85 r270 top (schematic designator R64)
R65A "100k" RESC1005X40N 73.5,42.9 r0 top (schematic designator R65)
R65B "100k" RESC1005X40N 73.5,87.1 r0 top (schematic designator R65)
R66A "330" RESC1005X40N 26.7,6.1 r0 top (schematic designator R66)
R66B "330" RESC1005X40N 26.7,50.3 r0 top (schematic designator R66)
R67A "27" RESC1005X40N 28.2,6.6 r270 top (schematic designator R67)
R67B "27" RESC1005X40N 28.2,50.8 r270 top (schematic designator R67)
R68A "820" RESC1005X40N 24.3,6.1 r0 top (schematic designator R68)
R68B "820" RESC1005X40N 24.3,50.3 r0 top (schematic designator R68)
R69A "330" RESC1005X40N 24.3,7.1 r0 top (schematic designator R69)
R69B "330" RESC1005X40N 24.3,51.3 r0 top (schematic designator R69)
R70A "1k" RESC1005X40N 27.1,17.7 r0 top (schematic designator R70)
R70B "1k" RESC1005X40N 27,61.9 r0 top (schematic designator R70)
R71A "1k" RESC1005X40N 28,16.7 r0 top (schematic designator R71)
R71B "1k" RESC1005X40N 28,60.9 r0 top (schematic designator R71)
R72A "27" RESC1005X40N 29.5,16.2 r90 top (schematic designator R72)
R72B "27" RESC1005X40N 29.5,60.4 r90 top (schematic designator R72)
R73A "1k" RESC1005X40N 25.6,16.7 r0 top (schematic designator R73)
R73B "1k" RESC1005X40N 25.6,60.9 r0 top (schematic designator R73)
R74A "1k" RESC1005X40N 25.6,15.7 r0 top (schematic designator R74)
R74B "1k" RESC1005X40N 25.6,59.9 r0 top (schematic designator R74)
R75 "10k" RESC1005X40N 80.8,47.7 r0 top
R76 "10k" RESC1005X40N 77.8,54.8 r0 top
R77 "0" RESC1005X40N 75.8,55.8 r0 top
R78 "10k" RESC1005X40N 80.8,46.7 r180 top
R79 "390" RESC1005X40N 119.776,9.694 r90 top
R80 "390" RESC1005X40N 155.994,40.756 r180 bottom
R81 "47" RESC1005X40N 122.376,14.294 r180 top
R82 "47" RESC1005X40N 158.494,45.556 r0 bottom
R83 "1k" RESC1005X40N 122.376,13.294 r0 top
R84 "150" RESC1005X40N 120.376,13.294 r0 top
R85 "150" RESC1005X40N 158.294,40.756 r0 bottom
R86 "1k" RESC1005X40N 156.594,45.556 r0 bottom
R87 "390" RESC1005X40N 155.994,5.556 r180 bottom
R88 "390" RESC1005X40N 145.494,31.256 r270 bottom
R89 "47" RESC1005X40N 158.494,10.356 r0 bottom
R90 "47" RESC1005X40N 149.494,33.956 r90 bottom
R91 "150" RESC1005X40N 158.294,5.556 r0 bottom
R92 "1k" RESC1005X40N 156.594,10.356 r0 bottom
R93 "150" RESC1005X40N 148.794,28.356 r0 bottom
R94 "1k" RESC1005X40N 151.294,31.356 r180 bottom
R95 "390" RESC1005X40N 145.494,13.656 r270 bottom
R96 "390" RESC1005X40N 155.994,23.156 r180 bottom
R97 "47" RESC1005X40N 149.494,16.356 r90 bottom
R98 "47" RESC1005X40N 158.494,27.956 r0 bottom
R99 "150" RESC1005X40N 148.794,10.756 r0 bottom
R100 "47" RESC1608X55N 143.994,85.156 r180 top
R101 "47" RESC1608X55N 160.594,84.956 r0 top
R102 "100k" RESC1005X40N 153.594,85.756 r270 bottom
R103 "47" RESC1608X55N 143.994,90.756 r180 top
R104 "47" RESC1608X55N 140.494,79.256 r0 top
R105 "0R5" RESC6532X80N 142.794,82.156 r180 top
R106 "2k7" RESC1608X55N 150.894,84.856 r0 bottom
R107 "47" RESC1608X55N 153.294,80.156 r270 top
R108 "1k" RESC1005X40N 152.594,76.156 r0 top
R109 "47" RESC1608X55N 158.994,77.056 r90 top
R110 "47" RESC1608X55N 149.094,77.656 r0 top
R111 "47" RESC1608X55N 159.094,82.256 r90 top
R112 "1M" RESC1608X55N 149.894,80.156 r90 top
R113 "47" RESC1608X55N 155.694,81.156 r180 top
R114 "806" RESC1608X55N 126.5,57.4 r180 bottom
R115 "1k6" RESC1608X55N 128.8,54.3 r90 bottom
R116 "39k" RESC1005X40N 113.5,4 r180 top
R117 "47" RESC1608X55N 123.8,55.6 r90 bottom
R118 "2k2" RESC1005X40N 121.7,53.5 r0 bottom
R119 "1k" RESC1005X40N 151.294,13.756 r180 bottom
R120 "150" RESC1005X40N 158.274,23.176 r0 bottom
R121 "1k" RESC1005X40N 156.594,27.956 r0 bottom
R122 "39k" RESC1005X40N 113.3,38.6 r180 top
R123 "39k" RESC1005X40N 101,10.9 r180 top
R124 "39k" RESC1005X40N 113.3,29.3 r180 top
R125 "39k" RESC1005X40N 101.4,25.3 r180 top
R126 "3k09" RESC1608X55N 120.6,55.6 r90 bottom
R127 "560k" RESC1608X55N 177.594,81.956 r180 top
R128 "49k9" RESC1608X55N 179.544,75.956 r180 top
R129 "150k" RESC1608X55N 180.694,81.956 r180 top
R130 "22" RESC1005X40N 189.394,-1.144 r0 top
R131 "22" RESC1005X40N 189.394,0.856 r0 top
R132 "1k6" RESC1005X40N -1.8,5.3 r270 bottom
R133 "22" RESC1005X40N 191.594,4.556 r0 top
R134 "10k" RESC1608X55N 184.294,11.356 r270 top
R135 "0" RESC1005X40N 184.594,13.856 r270 top
R136 "22" RESC1005X40N 189.394,-0.144 r0 top
R137 "0" RESC1005X40N 187.294,16.956 r180 top
R138 "22" RESC1005X40N 193.594,4.556 r0 top
R139 "499" RESC1005X40N 181.794,68.556 r180 top
R140 "10k" RESC1005X40N 179.894,68.556 r0 top
R141 "1k" RESC1005X40N -2.8,5.3 r270 bottom
R142 "499" RESC1005X40N 112.6,46 r180 top
R143 "0" RESC1005X40N 179.522,30.167 r0 bottom
R144 "0" RESC1005X40N 179.535,29.202 r0 bottom
R145 "0" RESC1005X40N 198.293,55.948 r180 bottom
R146 "0" RESC1005X40N 198.483,52.697 r180 bottom
R147 "0" RESC1005X40N 198.61,48.379 r180 bottom
R148 "0" RESC1005X40N 198.686,42.207 r180 bottom
R149 "0" RESC1005X40N 198.737,40.251 r180 bottom
R150 "0" RESC1005X40N 198.864,35.984 r180 bottom
R151 "0" RESC1005X40N 198.915,32.885 r180 bottom
R152 "0" RESC1005X40N 198.737,29.228 r180 bottom
R153 "22" RESC1005X40N 167.594,4.456 r90 top
R154 "200" RESC1005X40N 167.594,2.556 r90 top
R155 "10k" RESC1608X55N 166.294,3.156 r90 top
R156 "0" RESC1005X40N 179.471,41.877 r180 bottom
R157 "0" RESC1005X40N 179.484,40.226 r180 bottom
R158 "0" RESC1005X40N 179.484,34.765 r180 bottom
R159 "0" RESC1005X40N 179.564,32.756 r180 bottom
R160 "10k" RESC1608X55N 179.394,7.656 r90 top
R161 "0" RESC1005X40N 198.356,54.983 r180 bottom
R162 "0" RESC1005X40N 198.483,51.681 r180 bottom
R163 "0" RESC1005X40N 198.636,47.439 r180 bottom
R164 "0" RESC1005X40N 198.686,43.127 r180 bottom
R165 "10k" RESC1608X55N 176.194,7.656 r270 top
R166 "10k" RESC1608X55N 180.994,7.656 r270 top
R167 "0" RESC1005X40N 198.737,39.311 r180 bottom
R168 "0" RESC1005X40N 198.864,36.924 r180 bottom
R169 "0" RESC1005X40N 198.915,31.955 r180 bottom
R170 "0" RESC1005X40N 198.737,28.288 r180 bottom
R171 "0" RESC1005X40N 179.509,54.983 r180 bottom
R172 "0" RESC1005X40N 179.484,51.021 r180 bottom
R173 "0" RESC1005X40N 179.382,46.855 r180 bottom
R174 "0" RESC1005X40N 179.471,42.817 r180 bottom
R175 "0" RESC1005X40N 179.484,39.311 r180 bottom
R176 "0" RESC1005X40N 179.484,35.679 r180 bottom
R177 "0" RESC1005X40N 179.564,31.856 r180 bottom
R178 "10k" RESC1608X55N 177.794,7.656 r270 top
R179 "2k7" RESC1608X55N 182.794,4.156 r90 top
R180 "10k" RESC1608X55N 182.794,-0.044 r270 top
R181 "0" RESC1005X40N 168.794,2.656 r90 top
R182 "0" RESC1005X40N 168.794,5.356 r270 top
R183 "2k7" RESC1608X55N 184.294,7.656 r90 top
R184 "10k" RESC1608X55N 187.894,7.656 r90 top
R185 "10k" RESC1608X55N 173.294,11.756 r0 top
R186 "0" RESC1005X40N 189.294,3.156 r180 bottom
R187 "0" RESC1005X40N 189.294,2.156 r180 bottom
R188 "0" RESC1005X40N 179.509,55.923 r180 bottom
R189 "0" RESC1005X40N 179.484,50.081 r180 bottom
R190 "0" RESC1005X40N 179.37,47.775 r180 bottom
R191 "10k" RESC1005X40N 175.694,86.356 r180 bottom
R192 "2M" RESC1005X40N 175.694,87.556 r0 bottom
R193 "10k" RESC1005X40N 175.294,84.856 r270 bottom
R194 "499" RESC1005X40N 110.7,46 r0 top
R195 "10k" RESC1005X40N 112.6,45 r180 top
R196 "10k" RESC1005X40N 110.7,45 r0 top
R197 "33k" RESC1005X40N 87.5,45.9 r270 top
R198 "100k" RESC1005X40N 89.7,43.7 r180 top
R199 "100k" RESC1005X40N 89.7,44.7 r180 top
R200 "499" RESC1005X40N 87.5,51.67 r90 top
R201 "2k2" RESC1005X40N 87.5,47.8 r270 top
R202 "33k" RESC1005X40N 86.88,90 r0 top
R203 "2k2" RESC1005X40N 86.88,89 r0 top
R204 "499" RESC1005X40N 84.7,90.5 r0 top
R205 "100k" RESC1005X40N 79.6,88.7 r90 top
R206 "100k" RESC1005X40N 78.6,88.7 r90 top
R207A "220" RESC1005X40N 32.3,12.2 r90 bottom (schematic designator R207)
R207B "220" RESC1005X40N 53.7,17.4 r270 bottom (schematic designator R207)
R207C "220" RESC1005X40N 20.2,41.7 r90 bottom (schematic designator R207)
R207D "220" RESC1005X40N 66.9,37.3 r270 bottom (schematic designator R207)
R207E "220" RESC1005X40N 32.3,56.4 r90 bottom (schematic designator R207)
R207F "220" RESC1005X40N 53.7,61.6 r270 bottom (schematic designator R207)
R207G "220" RESC1005X40N 20.2,85.9 r90 bottom (schematic designator R207)
R207H "220" RESC1005X40N 66.9,81.5 r270 bottom (schematic designator R207)
R208A "100k" RESC1005X40N 32.3,10.4 r90 top (schematic designator R208)
R208B "100k" RESC1005X40N 53.7,19.2 r270 top (schematic designator R208)
R208C "100k" RESC1005X40N 20.2,39.9 r90 top (schematic designator R208)
R208D "100k" RESC1005X40N 66.9,39.1 r270 top (schematic designator R208)
R208E "100k" RESC1005X40N 32.3,54.6 r90 top (schematic designator R208)
R208F "100k" RESC1005X40N 53.7,63.4 r270 top (schematic designator R208)
R208G "100k" RESC1005X40N 20.2,84.1 r90 top (schematic designator R208)
R208H "100k" RESC1005X40N 66.9,83.3 r270 top (schematic designator R208)
R209A "220" RESC1005X40N 75.3,42.9 r0 bottom (schematic designator R209)
R209B "220" RESC1005X40N 75.3,87.1 r0 bottom (schematic designator R209)
R210A "100k" RESC1005X40N 73.5,42.9 r0 bottom (schematic designator R210)
R210B "100k" RESC1005X40N 73.5,87.1 r0 bottom (schematic designator R210)
R211 "39k" RESC1005X40N 113.5,13.3 r180 top
R212A "8R2" RESC2012X60N 3.9,44.7 r0 top (schematic designator R212)
R212B "8R2" RESC2012X60N 3.9,83.7 r0 top (schematic designator R212)
R213A "510" RESC1005X40N 19.5,22.3 r90 top (schematic designator R213)
R213B "510" RESC1005X40N 19.5,65.5 r90 top (schematic designator R213)
R214A "2k2" RESC1005X40N 20.3,12.8 r270 top (schematic designator R214)
R214B "2k2" RESC1005X40N 20.3,51.8 r270 top (schematic designator R214)
R215A "680" RESC1005X40N 20.3,18.6 r270 top (schematic designator R215)
R215B "680" RESC1005X40N 20.3,57.6 r270 top (schematic designator R215)
R216A "8R2" RESC2012X60N 5.7,22 r270 top (schematic designator R216)
R216B "8R2" RESC2012X60N 5.7,61 r270 top (schematic designator R216)
R217A "8R2" RESC2012X60N 7.9,16.8 r270 top (schematic designator R217)
R217B "8R2" RESC2012X60N 7.9,55.8 r270 top (schematic designator R217)
R218A "8R2" RESC2012X60N 9.6,22.7 r180 top (schematic designator R218)
R218B "8R2" RESC2012X60N 9.6,61.7 r180 top (schematic designator R218)
R219A "8R2" RESC2012X60N 9.6,26.7 r0 top (schematic designator R219)
R219B "8R2" RESC2012X60N 9.6,65.7 r0 top (schematic designator R219)
R220A "150" RESC2012X60N 5.8,16.8 r90 top (schematic designator R220)
R220B "150" RESC2012X60N 5.8,55.8 r90 top (schematic designator R220)
R221A "150" RESC2012X60N 9.6,24.7 r180 top (schematic designator R221)
R221B "150" RESC2012X60N 9.6,63.7 r180 top (schematic designator R221)
R222A "47" RESC1005X40N 12.1,14.6 r0 top (schematic designator R222)
R222B "47" RESC1005X40N 12.1,53.6 r0 top (schematic designator R222)
R223A "47" RESC1005X40N 12.2,21 r0 top (schematic designator R223)
R223B "47" RESC1005X40N 12.1,60 r0 top (schematic designator R223)
R224A "27" RESC2012X60N 5.7,11.3 r90 top (schematic designator R224)
R224B "27" RESC2012X60N 5.7,50.3 r90 top (schematic designator R224)
R225A "0" RESC1005X40N 11.1,43.6 r0 top (schematic designator R225)
R225B "0" RESC1005X40N 11.1,82.6 r0 top (schematic designator R225)
R257 "0" RESC1005X40N 191.114,7.556 r180 bottom
R260 "0" RESC1005X40N 191.114,8.556 r180 bottom
R261 "0" RESC1005X40N 191.114,5.556 r180 bottom
R262 "0" RESC1005X40N 191.114,6.556 r180 bottom
SW1 "Switch" JUMPSMD0805_G50 144.694,82.156 r180 bottom
T1 "BSS138LT1G" SOT95P240X110-3N 169.994,8.056 r180 top
T2 "BSS138LT1G" SOT95P240X110-3N 167.394,-0.444 r90 top
T3 "BSS138LT1G" SOT95P240X110-3N 112.7,47.3 r90 bottom
T4 "BSS138LT1G" SOT95P240X110-3N 111.9,51.3 r0 bottom
T7 "FDS9926A" SOIC127P600X175-8N 136.894,88.256 r180 top
T12 "BSS138LT1G" SOT95P240X110-3N 122.076,10.794 r270 top
T13 "BSS138LT1G" SOT95P240X110-3N 157.614,43.136 r180 bottom
T14 "BSS138LT1G" SOT95P240X110-3N 157.594,7.956 r180 bottom
T15 "BSS138LT1G" SOT95P240X110-3N 148.094,30.856 r180 bottom
T16 "BSS138LT1G" SOT95P240X110-3N 148.094,13.256 r180 bottom
T17 "BSS138LT1G" SOT95P240X110-3N 157.614,25.536 r180 bottom
T18 "BSS138LT1G" SOT95P240X110-3N 179.694,71.056 r0 top
T19 "BSS138LT1G" SOT95P240X110-3N 185.894,4.356 r180 top
T20 "BSS138LT1G" SOT95P240X110-3N 185.894,0.856 r180 top
T21 "SI4425DDY-T1-GE3" SOIC127P600X175-8N 178.594,87.756 r270 top
T22 "BC847B" SOT95P230X110-3N 172.894,86.056 r90 bottom
Tr1 "RTNC-40X25X15(M-083)" RTNC-40X25X15(M-083) 115.062,71.431 r225 top locked